# Altium PCB SkyWindow_PCB.PcbDoc
Units mm, origin at the board's own origin, x right, y up, seen from the top; angles counter-clockwise.
Board outline 80.25 x 70.25 mm, 2 copper layers (Top Layer, Bottom Layer); 10 components, 23 nets, 77 pads, 0 vias.
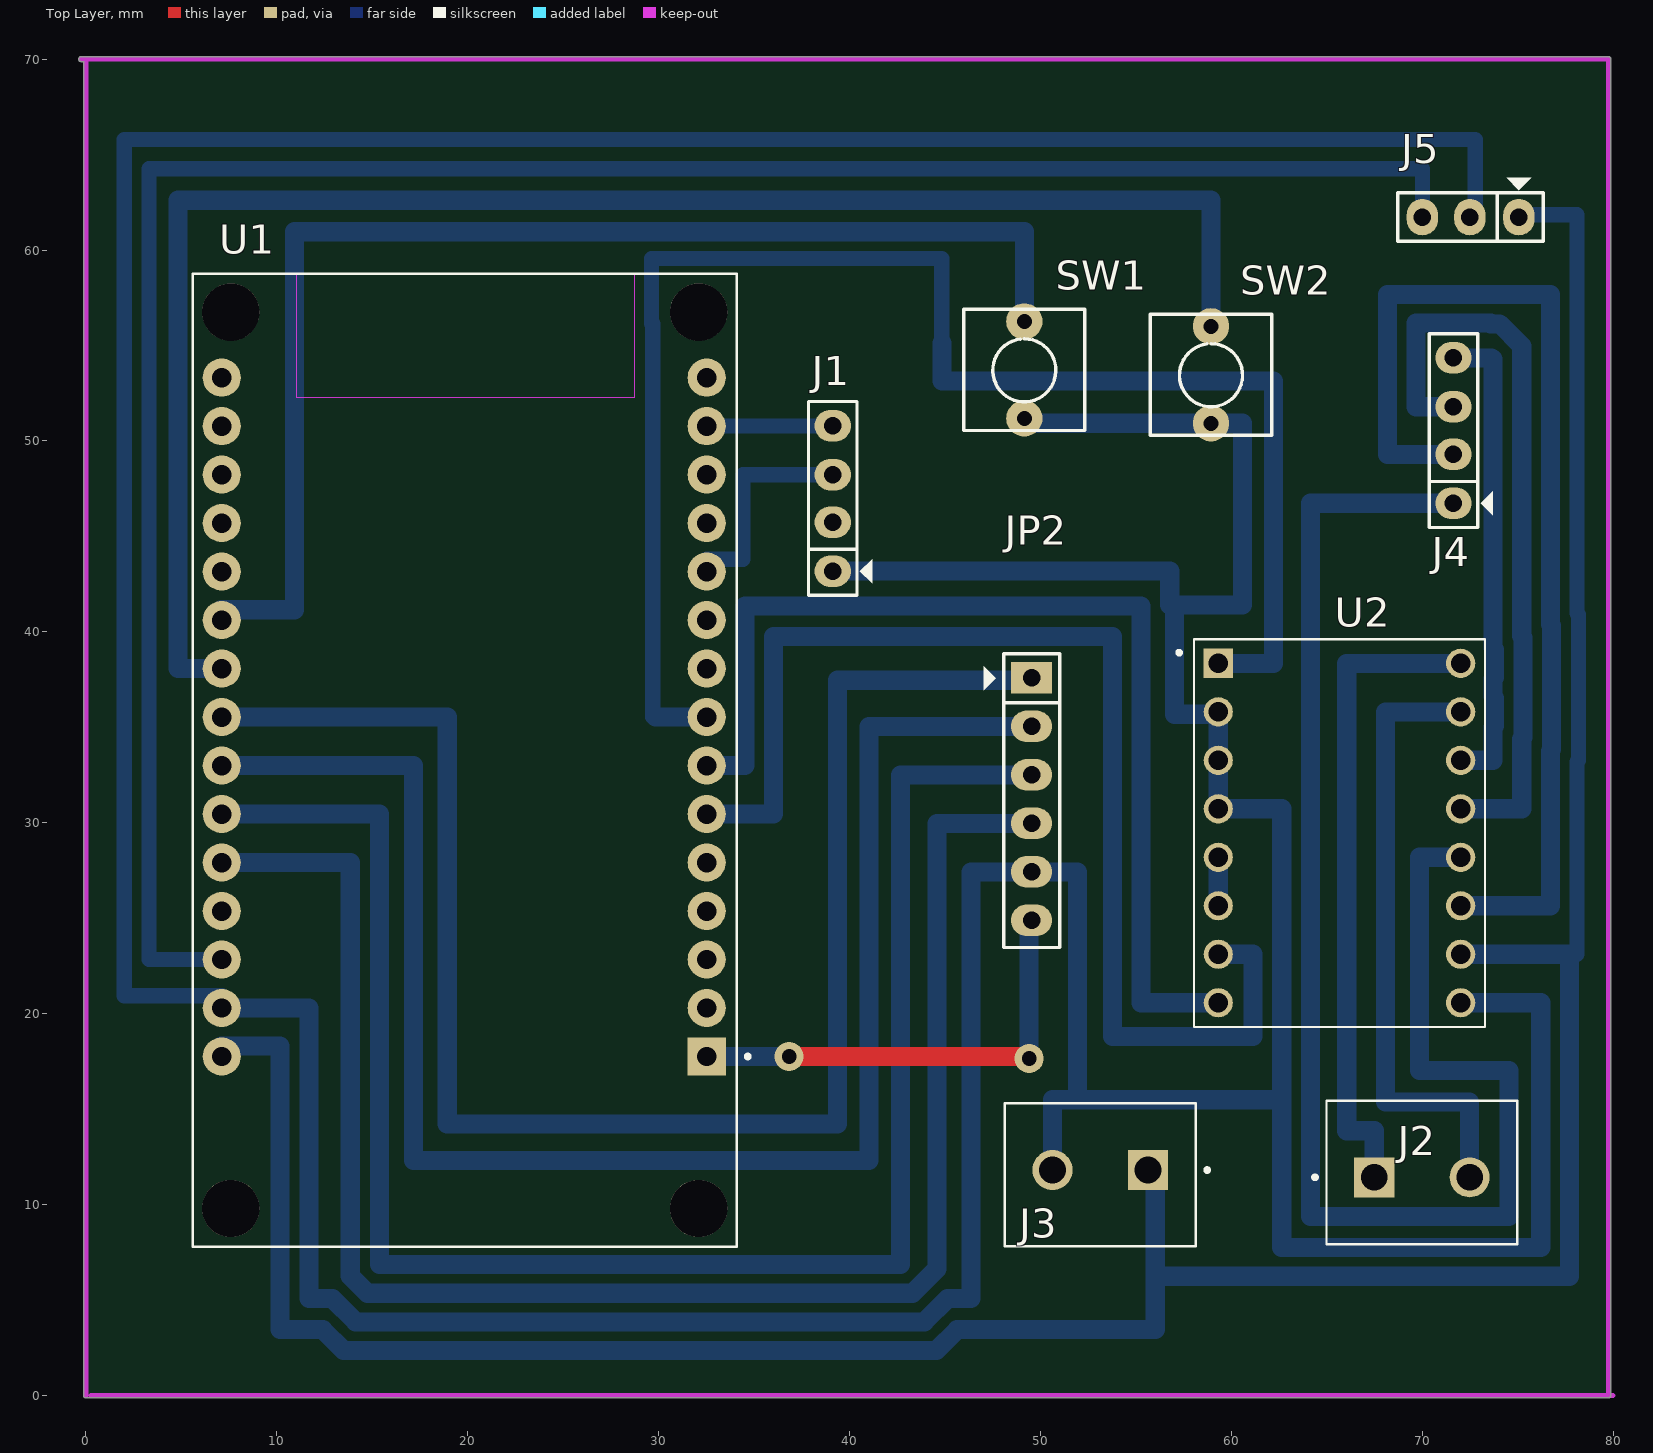
[diagram p0: Top Layer view]
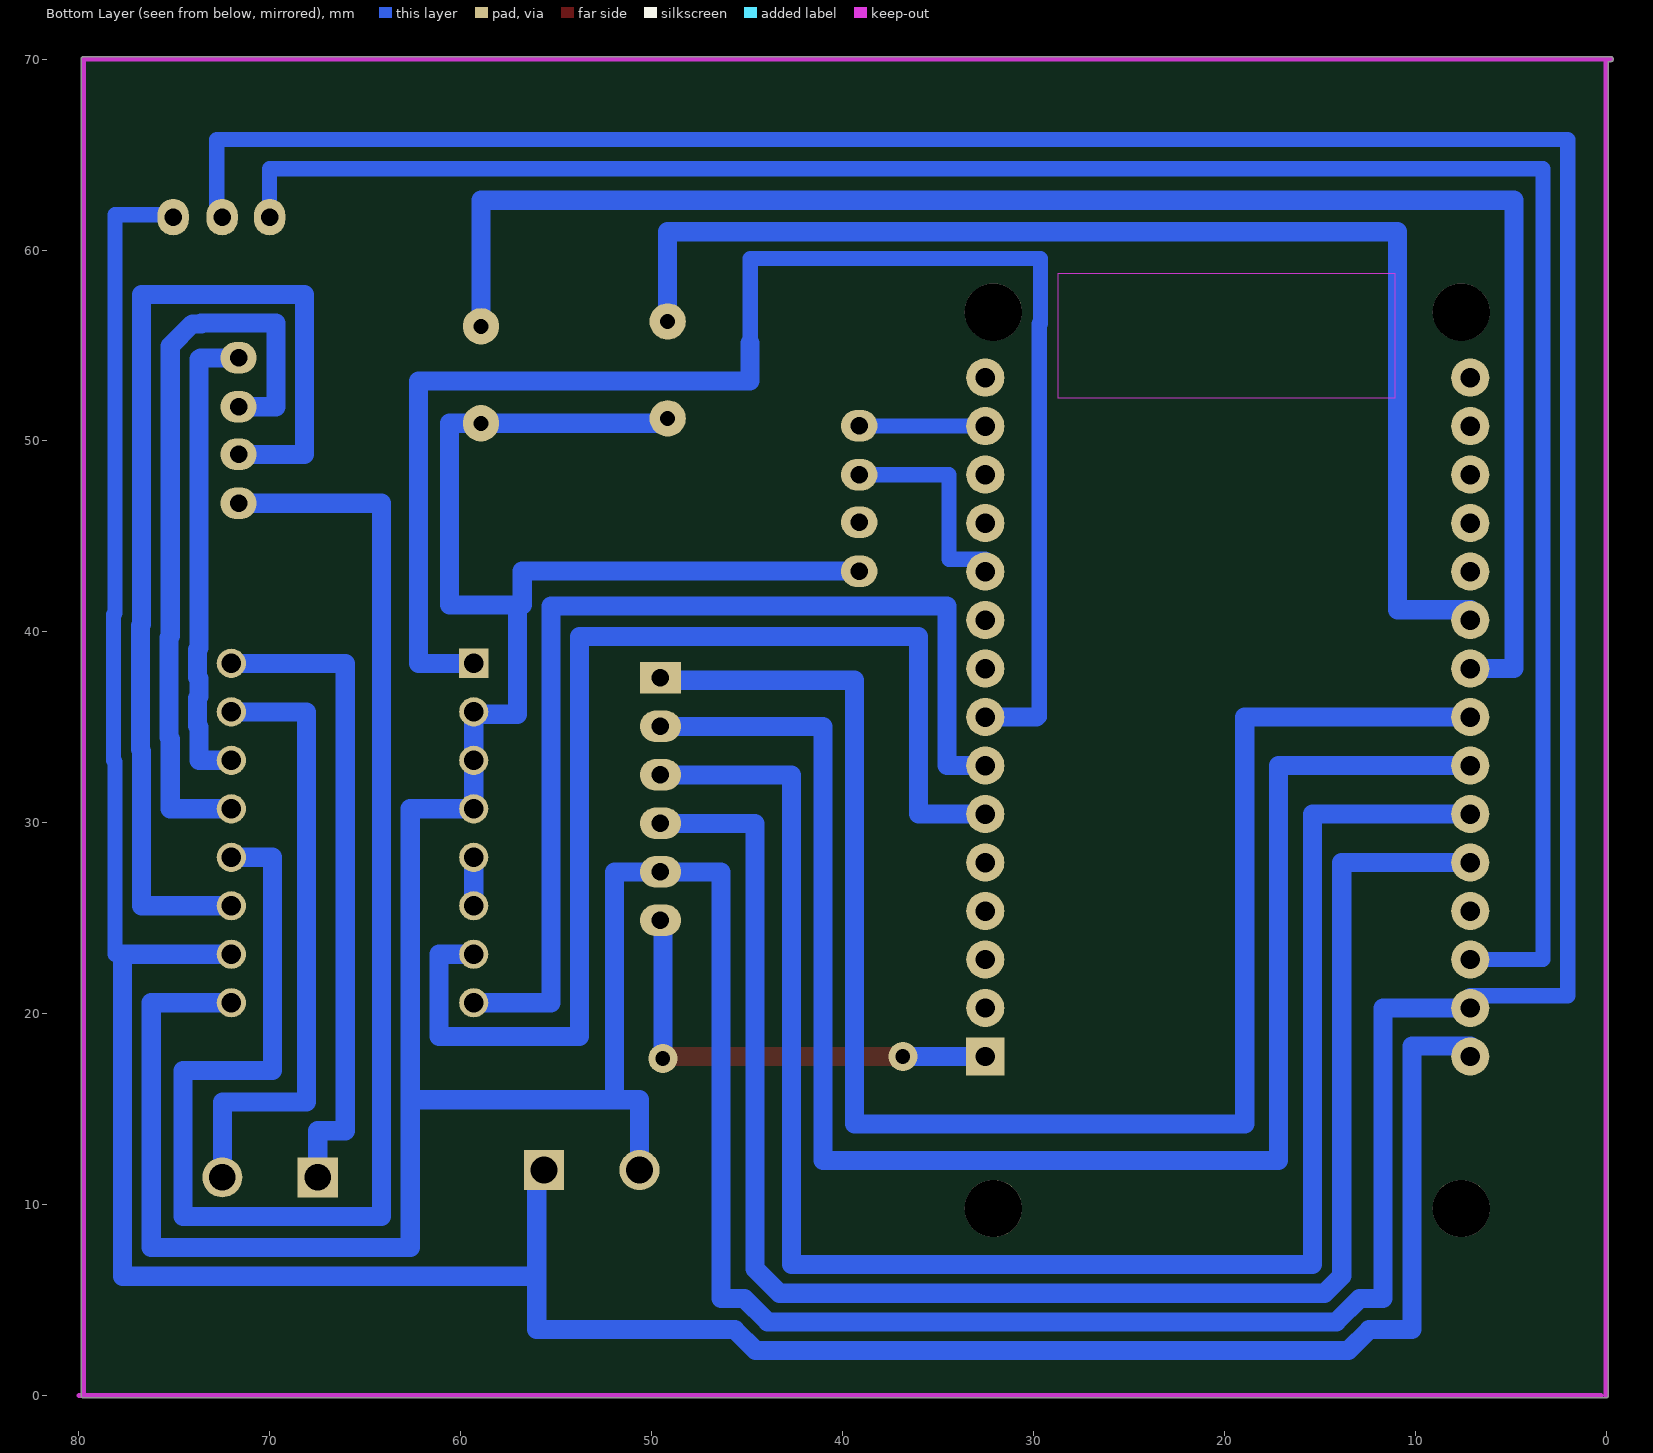
[diagram p1: Bottom Layer view, seen from below]

## Layer stack, top to bottom
Top Solder: solder mask 0.0102, Solder Resist, Dk 3.5
Top Layer: signal copper 0.0356
Dielectric 1: dielectric 0.32, FR-4, Dk 4.8
Bottom Layer: signal copper 0.0356
Bottom Solder: solder mask 0.0102, Solder Resist, Dk 3.5

## Board outline
-0.254,69.873 cw(c-0.254,70) -0.254,70.127 79.746,70.127 cw(c79.746,70) 79.873,70 79.873,0 cw(c79.746,0) 79.746,-0.127 0,-0.127 cw(c0,0) -0.127,0 -0.127,69.873

## Design rules (kind name [scope] priority, off if disabled: settings)
Clearance [All] p1: gap=0.5
PolygonConnect [All] p1: connectstyle=Relief reliefconductorwidth=0.254 reliefentries=4 polygonreliefangle="90 Angle" airgapwidth=0.254
RoutingVias [All] p1: holewidth=0.711 width=2.54 viastyle="Through Hole" minholewidth=0.711 minwidth=1.67 maxholewidth=0.711 maxwidth=2.54
SolderMaskExpansion [All] p1: expansion=0.102
Width [All] p1: maxlimit=1.5 minlimit=0.8 preferedwidth=1
30 further rules are at their usual default settings.

## Components (designator, comment, footprint, x,y, rotation, side; value= is the part's Value field where it differs from the comment)
J1 "2.54_4P" JP4 39.116,45.72 r90 top
J2 "KF301-2P" HANDSON_KF301-2P 69.977,11.43 r0 top
J3 "KF301-2P" HANDSON_KF301-2P 53.126,11.811 r180 top
J4 "2.54_4P" JP4 71.628,49.276 r90 top
J5 "2.54_3P" JP3 72.517,61.722 r180 top
JP2 "2.54_6P" JP6 49.53,37.592 r270 top
SW1 "Nut Nhan 2 Chan ( Dip )" SW2 49.149,51.181 r90 top
SW2 "Nut Nhan 2 Chan ( Dip )" SW2 58.928,50.927 r90 top
U1 "ESP32-DEVKIT-V1" MODULE_ESP32_DEVKIT_V1 19.812,33.274 r180 top
U2 "A4988_STEPPER_MOTOR_DRIVER_CARRIER" MODULE_A4988_STEPPER_MOTOR_DRIVER_CARRIER 65.659,29.464 r0 top

## Footprints (in the part's own frame and the unit in brackets; to place one, negate y for a bottom-side part, rotate by r counter-clockwise, add the part's x,y. Pads: shape width x height; smd on the part's side, far side on the other; paste and mask are expansions set on the pad)
HANDSON_KF301-2P [mm]
  rect 2.1x2.1 hole 1.4: 1(-2.5,0)
  round 2.1 hole 1.4: 2(2.5,0)
  silkscreen extent -5.7,-3.5 5,4
JP3 [mil] "Jumper 3"
  oval 65x75 hole 36: 1(-100,0) 2(1,0) 3(99,0)
  silkscreen extent -150,-81 150,50, body extent -150,-60 150,55, height 355
JP4 [mil] "Jumper 4"
  oval 65x75 hole 36: 1(-100,0) 2(1,0) 3(99,0) 4(200,0)
  silkscreen extent -150,-81 250,50, body extent -148,-48 248,50, height 323
JP6 [mil] "JP6"
  rect 65x85 hole 36: 1(0,0)
  oval 65x85 hole 36: 2(100,0) 3(200,0) 4(300,0) 5(400,0) 6(500,0)
  silkscreen extent -50,-99 556,58, body extent -48,-50 548,48, height 323
MODULE_A4988_STEPPER_MOTOR_DRIVER_CARRIER [mm]
  rect 1.53x1.53 hole 1.02: 1(-6.35,8.89)
  round 1.53 hole 1.02: 2(-6.35,6.35) 3(-6.35,3.81) 4(-6.35,1.27) 5(-6.35,-1.27) 6(-6.35,-3.81) 7(-6.35,-6.35) 8(-6.35,-8.89) 9(6.35,-8.89) 10(6.35,-6.35) 11(6.35,-3.81) 12(6.35,-1.27) 13(6.35,1.27) 14(6.35,3.81) 15(6.35,6.35) 16(6.35,8.89)
  silkscreen extent -8.5,-10.16 7.62,10.16
MODULE_ESP32_DEVKIT_V1 [mm]
  rect 2x2 / inner round 2 / far side rect 2x2 hole 1.02: 1(-12.7,15.515)
  round 2 hole 1.02: 2(-12.7,12.975) 3(-12.7,10.435) 4(-12.7,7.895) 5(-12.7,5.355) 6(-12.7,2.815) 7(-12.7,0.275) 8(-12.7,-2.265) 9(-12.7,-4.805) 10(-12.7,-7.345) 11(-12.7,-9.885) 12(-12.7,-12.425) 13(-12.7,-14.965) 14(-12.7,-17.505) 15(-12.7,-20.045) 16(12.7,-20.045) 17(12.7,-17.505) 18(12.7,-14.965) 19(12.7,-12.425) 20(12.7,-9.885) 21(12.7,-7.345) 22(12.7,-4.805) 23(12.7,-2.265) 24(12.7,0.275) 25(12.7,2.815) 26(12.7,5.355) 27(12.7,7.895) 28(12.7,10.435) 29(12.7,12.975) 30(12.7,15.515)
  round 3 hole 3 unplated: ""(-12.28,23.475) ""(-12.28,-23.475) ""(12.23,23.475) ""(12.23,-23.475)
  Keep-Out Layer region: 8.78,-25.475 -8.91,-25.475 -8.91,-18.985 8.78,-18.985
  Keep-Out Layer region: 8.78,-25.475 -8.91,-25.475 -8.91,-18.985 8.78,-18.985
  silkscreen extent -14.95,-25.48 14.23,25.48
SW2 [mil] "SW button 2pin, 250x 250 mil"
  round 75 hole 31: 1(0,0) 2(200,0)
  silkscreen extent -25,-125 225,125

## Part data
J1 J4: library part "Jum Don Duc 2.54_4P", "C?m"
J2 J3: "2 Pin Terminal Block 5mm Pitch"
J5: library part "Jum Don Duc 2.54_3P", "C?m"
JP2: library part "Jum Don Duc 2.54_6P", "C?m"
SW1 SW2: "C?m"
U1: "Dual core, Wi-Fi: 2.4 GHz up to 150 Mbits/s,BLE (Bluetooth Low Energy) and legacy Bluetooth, 32 bits, Up to 240 MHz"
U2: "Stepper motor controler; IC: A4988; 1A; Uin mot: 8÷35V"

## Free pads (board coordinates)
  round 1.524 hole 0.762: 3(36.83,17.759) 6(49.403,17.653)

## Nets (pads, with @x,y where several pads share a name; then routed paths per layer and width w, separated by ;. In a path a pad name is that pad's centre, name@x,y a point inside that pad or via, vN(x,y) a via of type N, cw(c..) or ccw(c..) an arc to the next point about the centre after c; other vN are vias at no path point)
3.3V: JP2.6 pad.3 pad.6 U1.1 | length 24.3
  Top Layer w1: pad.3 pad.6@49.403,17.759
  Bottom Layer w1: U1.1 pad.3 ; pad.6 49.403,24.892 JP2.6
5V: J3.1 J5.1 U1.30 U2.10 | length 160
  Bottom Layer w0.8: J5.1@75.057,61.849 78.105,61.849 78.105,40.977 78.174,40.908 78.174,33.26 78.105,33.191 78.105,23.114 77.7,23.114
  Bottom Layer w1: U1.30@7.112,18.299 10.16,18.299 10.16,3.453 12.408,3.453 13.503,2.358 44.536,2.358 45.631,3.453 56.007,3.453 56.007,6.374 ; J3.1 56.007,11.811 56.007,6.374 ; U2.10 77.7,23.114 77.7,6.247 56.007,6.247 56.007,6.374
12V: J2.1 U2.16 | length 34.3
  Bottom Layer w1: J2.1 67.477,13.867 66.04,13.867 66.04,38.354 U2.16
A0: J5.3 U1.28 | length 114.5
  Bottom Layer w0.8: U1.28 3.302,22.839 3.302,64.262 70.002,64.262 J5.3
ADC1: JP2.1 U1.23 | length 87
  Bottom Layer w1: U1.23 18.923,35.539 18.923,14.224 39.37,14.224 39.37,37.465 JP2.1@49.53,37.465
ADC2: JP2.2 U1.24 | length 85.8
  Bottom Layer w1: U1.24 17.145,32.999 17.145,12.319 41.021,12.319 41.021,35.052 JP2.2
ADC3: JP2.3 U1.25 | length 91.7
  Bottom Layer w1: U1.25 15.367,30.459 15.367,6.858 42.672,6.858 42.672,32.512 JP2.3
ADC4: JP2.4 U1.26 | length 88.3
  Bottom Layer w1: U1.26 13.843,27.919 13.843,6.261 14.746,5.358 43.293,5.358 44.577,6.642 44.577,29.972 JP2.4
BTN1: SW1.2 U1.21 | length 67.1
  Bottom Layer w1: U1.21 7.112,41.159 10.922,41.159 10.922,60.96 49.149,60.96 SW1.2
BTN2: SW2.2 U1.22 | length 87.5
  Bottom Layer w1: U1.22 4.826,38.079 4.826,62.611 58.928,62.611 SW2.2
DIR: U1.7 U2.8 | length 55.9
  Bottom Layer w1: U1.7 34.512,32.999 34.512,41.354 55.269,41.354 55.269,20.574 U2.8
EN: U1.8 U2.1 | length 83.5
  Bottom Layer w0.8: 29.622,56.134 29.622,59.56 44.831,59.56 44.831,55.118 ; 29.692,56.134 29.692,35.539 29.845,35.539
  Bottom Layer w1: 29.845,35.539 U1.8 ; 44.831,55.118 44.831,53.134 62.206,53.134 62.206,38.354 U2.1
GND: J1.1 J3.2 J5.2 JP2.5 SW1.1 SW2.1 U1.29 U2.2 U2.3 U2.4 U2.9 | length 350.9
  Bottom Layer w0.8: U1.29 7.112,20.939 2.002,20.939 2.002,65.786 72.771,65.786 J5.2@72.771,61.722
  Bottom Layer w1: U1.29 11.684,20.299 11.684,5.08 12.902,5.08 14.124,3.858 43.915,3.858 45.137,5.08 46.355,5.08 46.355,27.432 JP2.5 51.943,27.432 51.943,15.494 ; J1.1 56.769,43.18 56.769,41.402 57.023,41.402 ; SW1.1 49.149,50.927 SW2.1 60.579,50.927 60.579,41.402 57.023,41.402 ; J3.2 50.626,15.494 51.943,15.494 ; U2.2 U2.2@59.309,35.687 ; U2.9 76.2,20.574 76.2,7.747 62.635,7.747 62.635,15.494 ; 51.943,15.494 62.635,15.494 ; 57.023,41.402 57.023,35.687 U2.2@59.309,35.687 ; U2.2@59.309,35.687 U2.3 U2.4 62.635,30.734 62.635,15.494
GNDMOT: J2.2 U2.15 | length 32.7
  Bottom Layer w1: U2.15 68.072,35.814 68.072,15.367 72.477,15.367 J2.2
NetJ4_1: J4.1 U2.12 | length 80.9
  Bottom Layer w1: J4.1 64.135,46.736 64.135,9.38 74.527,9.38 74.527,17.018 69.85,17.018 69.85,28.194 U2.12
NetJ4_2: J4.2 U2.11 | length 57.1
  Bottom Layer w1: J4.2 68.175,49.301 68.175,57.682 76.705,57.682 76.705,40.397 76.774,40.328 76.774,33.84 76.705,33.771 76.705,25.654 U2.11
NetJ4_3: J4.3 U2.13 | length 39.9
  Bottom Layer w1: J4.3 69.675,51.791 69.675,56.182 73.581,56.182 73.581,56.134 74.048,56.134 75.205,54.977 75.205,39.775 75.274,39.706 75.274,34.462 75.205,34.393 75.205,30.734 U2.13
NetJ4_4: J4.4 U2.14 | length 24.9
  Bottom Layer w1: J4.4 73.63,54.356 73.705,54.281 73.705,39.154 73.774,39.085 73.774,37.623 73.705,37.554 73.705,36.614 73.774,36.545 73.774,35.083 73.705,35.014 73.705,33.274 U2.14
NetU2_5: U2.5 U2.6 | length 2.5
  Bottom Layer w1: U2.6 U2.5
SCL: J1.4 U1.14 | length 6.6
  Bottom Layer w0.8: U1.14 J1.4@39.095,50.779
SDA: J1.3 U1.11 | length 11.7
  Bottom Layer w0.8: U1.11 32.512,43.799 34.412,43.799 34.412,48.235 J1.3
STEP: U1.6 U2.7 | length 65
  Bottom Layer w1: U1.6 36.012,30.459 36.012,39.751 53.769,39.751 53.769,18.809 54.483,18.809 54.483,18.796 61.135,18.796 61.135,23.114 U2.7
VCC: J1.2
pads on no net: U1. U1.2 U1.3 U1.4 U1.5 U1.9 U1.10 U1.12 U1.13 U1.15 U1.16 U1.17 U1.18 U1.19 U1.20 U1.27

## Keep-outs
Keep-Out Layer:
  lines w0.254: -0.254,70 79.746,70 79.746,0 ; 0,0 0,70 ; 0.254,0 80,0